# Altium PCB N-FPGA.PcbDoc
Units mil, origin at the board's own origin, x right, y up, seen from the top; angles counter-clockwise.
Board outline 6000 x 4000 mil, 2 copper layers (Top Layer, Bottom Layer); 1 components, 0 nets, 25 pads, 0 vias.
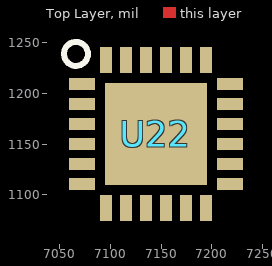
[diagram p0: Top Layer view]
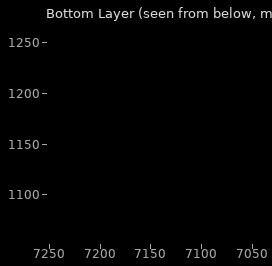
[diagram p1: Bottom Layer view, seen from below]

## Layer stack, top to bottom
Top Solder: solder mask 0.4, Solder Resist, Dk 3.5
Top Layer: signal copper 1.4
Dielectric 1: dielectric 12.6, FR-4, Dk 4.8
Bottom Layer: signal copper 1.4
Bottom Solder: solder mask 0.4, Solder Resist, Dk 3.5

## Board outline
1000,1000 7000,1000 7000,5000 1000,5000

## Design rules (kind name [scope] priority, off if disabled: settings)
Clearance [All] p1: gap=10
PolygonConnect [All] p1: connectstyle=Relief reliefconductorwidth=10 reliefentries=4 polygonreliefangle="90 Angle" airgapwidth=10
RoomDefinition N-FPGA [InComponentClass('N-FPGA')] p1: confinementstyle=ConfineIn formatcopy=TRUE lockcomponents=FALSE outline 7045,1065 7240,1065 7240,1360 7045,1360
RoutingVias [All] p1: holewidth=28 width=50 viastyle="Through Hole" minholewidth=28 minwidth=50 maxholewidth=28 maxwidth=50
SolderMaskExpansion [All] p1: expansion=4
UnpouredPolygon [All] p1: allowunpoured=FALSE
Width [All] p1: maxlimit=10 minlimit=10 preferedwidth=10
29 further rules are at their usual default settings.

## Components (designator, comment, footprint, x,y, rotation, side; value= is the part's Value field where it differs from the comment)
U22 "CP2112" QFN24 7145,1160 r0 top

## Footprints (in the part's own frame and the unit in brackets; to place one, negate y for a bottom-side part, rotate by r counter-clockwise, add the part's x,y. Pads: shape width x height; smd on the part's side, far side on the other; paste and mask are expansions set on the pad)
QFN24 [mm]
  rect 0.65x0.3 smd paste+0: 1(-1.85,1.25) 2(-1.85,0.75) 3(-1.85,0.25) 4(-1.85,-0.25) 5(-1.85,-0.75) 6(-1.85,-1.25) 13(1.85,-1.25) 14(1.85,-0.75) 15(1.85,-0.25) 16(1.85,0.25) 17(1.85,0.75) 18(1.85,1.25)
  rect 0.3x0.65 smd paste+0: 7(-1.25,-1.85) 8(-0.75,-1.85) 9(-0.25,-1.85) 10(0.25,-1.85) 11(0.75,-1.85) 12(1.25,-1.85) 19(1.25,1.85) 20(0.75,1.85) 21(0.25,1.85) 22(-0.25,1.85) 23(-0.75,1.85) 24(-1.25,1.85)
  rect 2.55x2.55 smd: 25(0,0)
  silkscreen extent -2.3,1.7 -1.7,2.3, body extent -2,-2 2,2, height 1

## Nets (pads, with @x,y where several pads share a name; then routed paths per layer and width w, separated by ;. In a path a pad name is that pad's centre, name@x,y a point inside that pad or via, vN(x,y) a via of type N, cw(c..) or ccw(c..) an arc to the next point about the centre after c; other vN are vias at no path point)
pads on no net: U22.1 U22.2 U22.3 U22.4 U22.5 U22.6 U22.7 U22.8 U22.9 U22.10 U22.11 U22.12 U22.13 U22.14 U22.15 U22.16 U22.17 U22.18 U22.19 U22.20 U22.21 U22.22 U22.23 U22.24 U22.25